# Altium PCB ufd0.PcbDoc
Units mil, origin at the board's own origin, x right, y up, seen from the top; angles counter-clockwise.
Board outline 6000 x 4000 mil, 6 copper layers (Top Layer, Ground1, Signal, Power, Ground2, Bottom Layer); 37 components, 40 nets, 120 pads, 0 vias.
Unrouted connection lines stored in the file: 66.
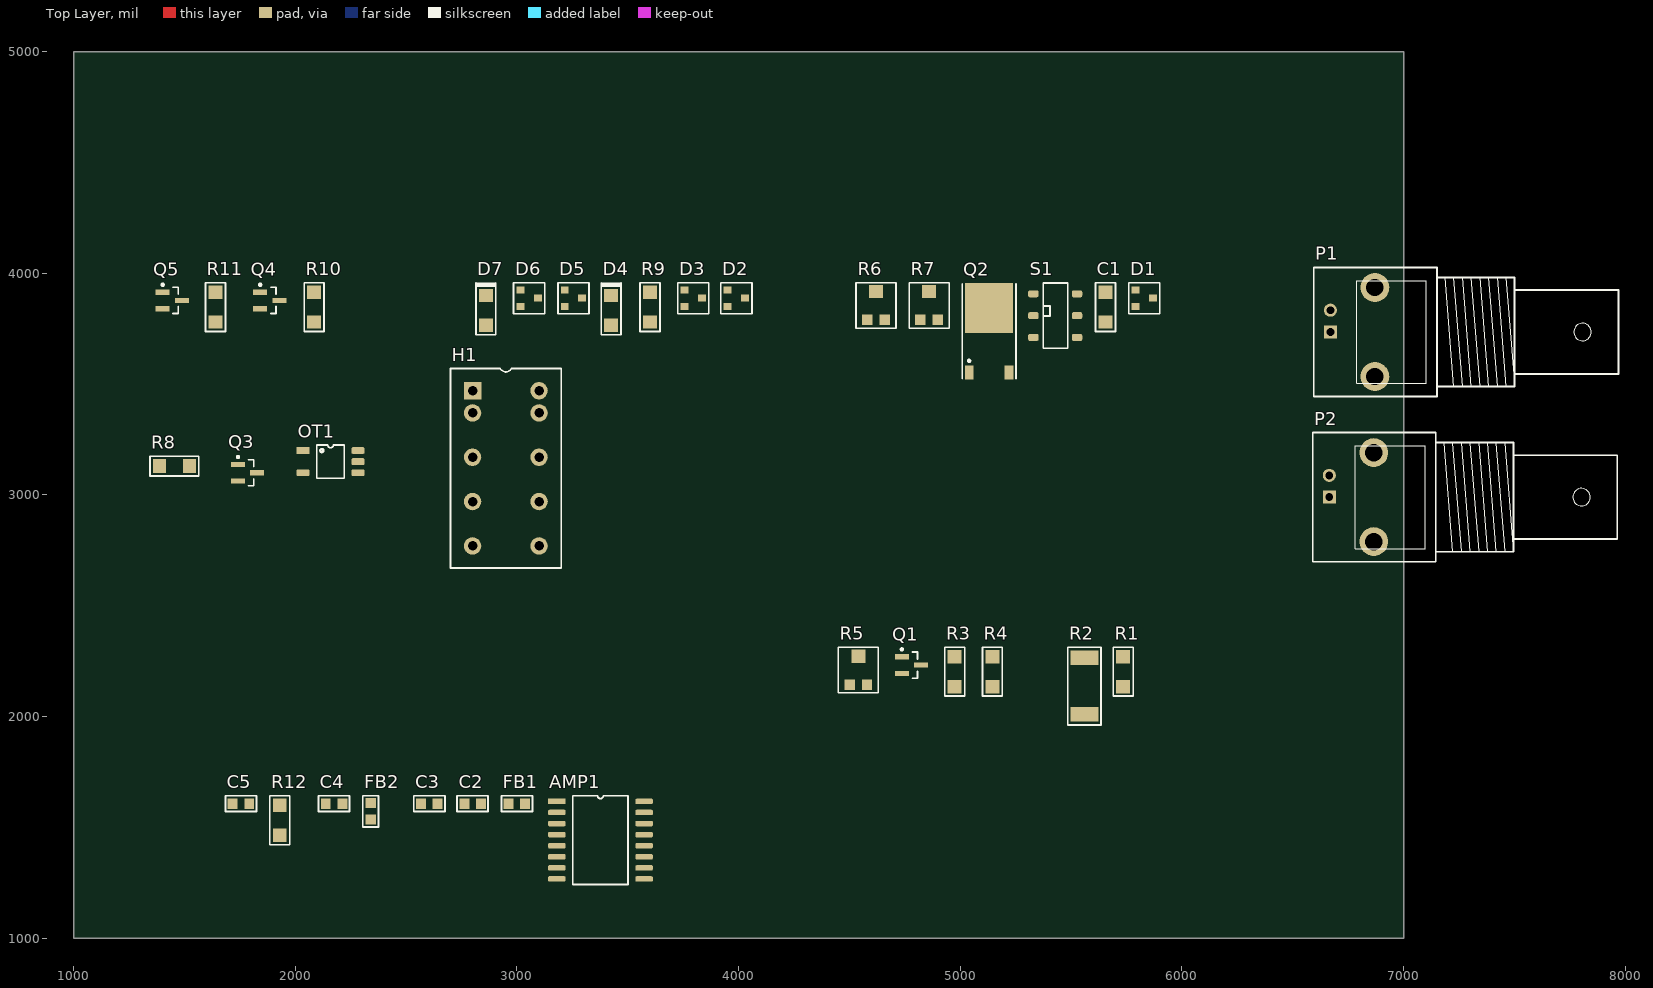
[diagram p0: Top Layer view]
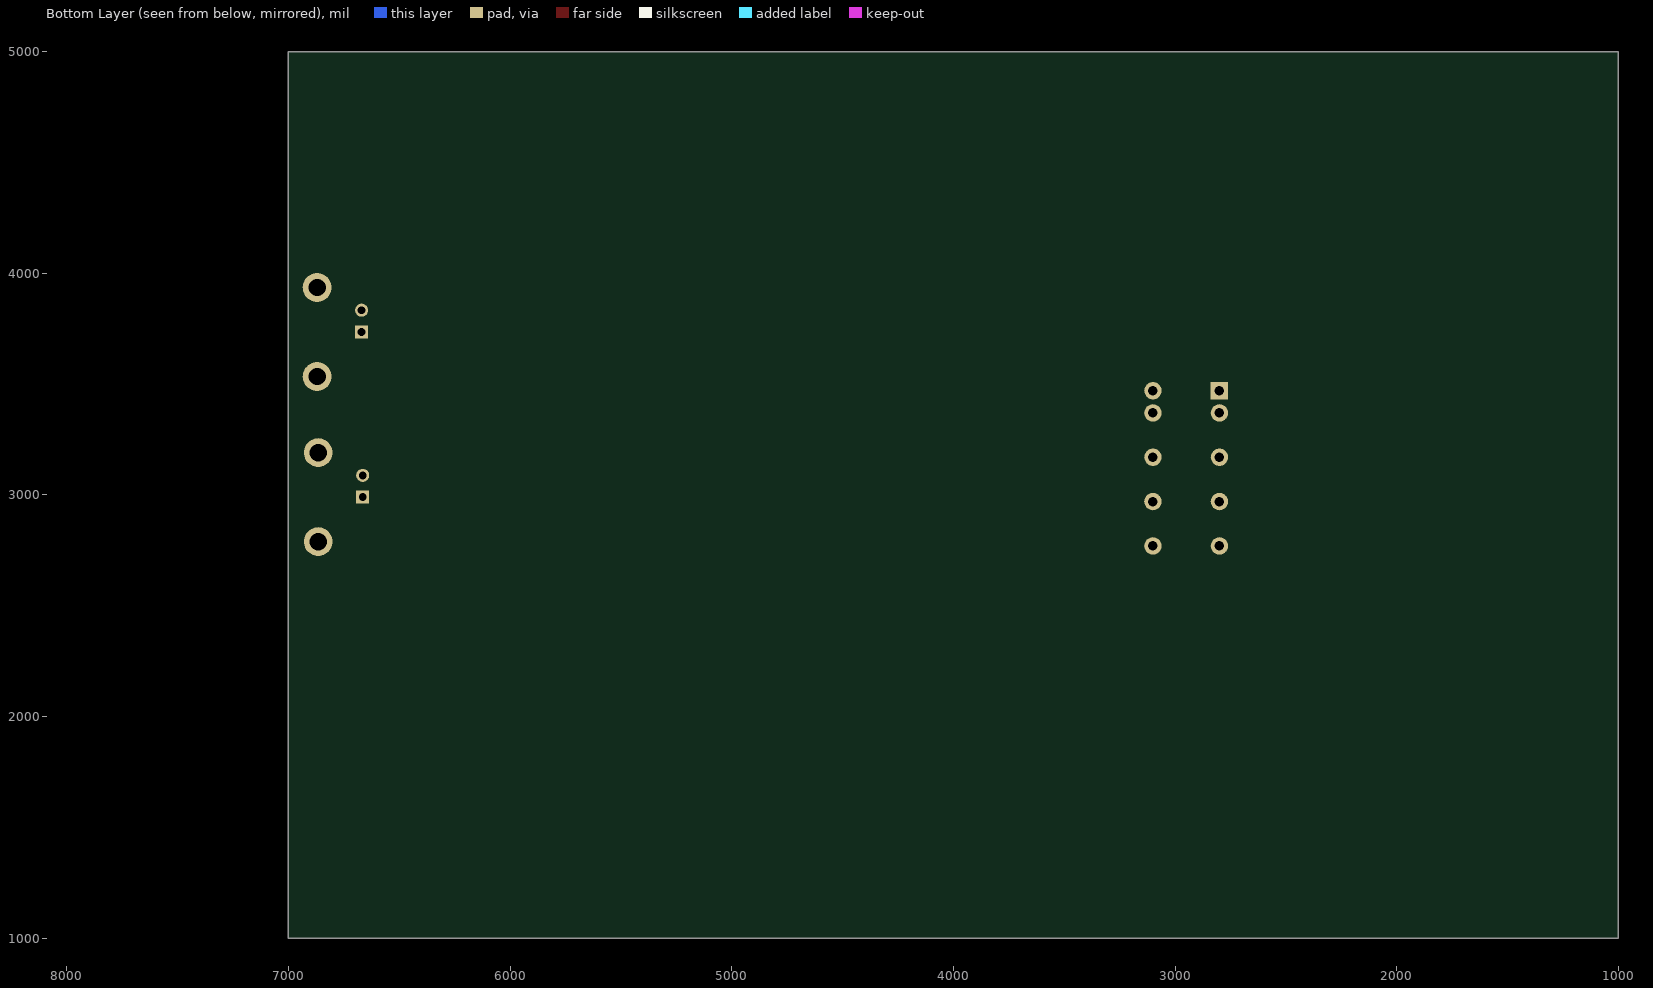
[diagram p1: Bottom Layer view, seen from below]
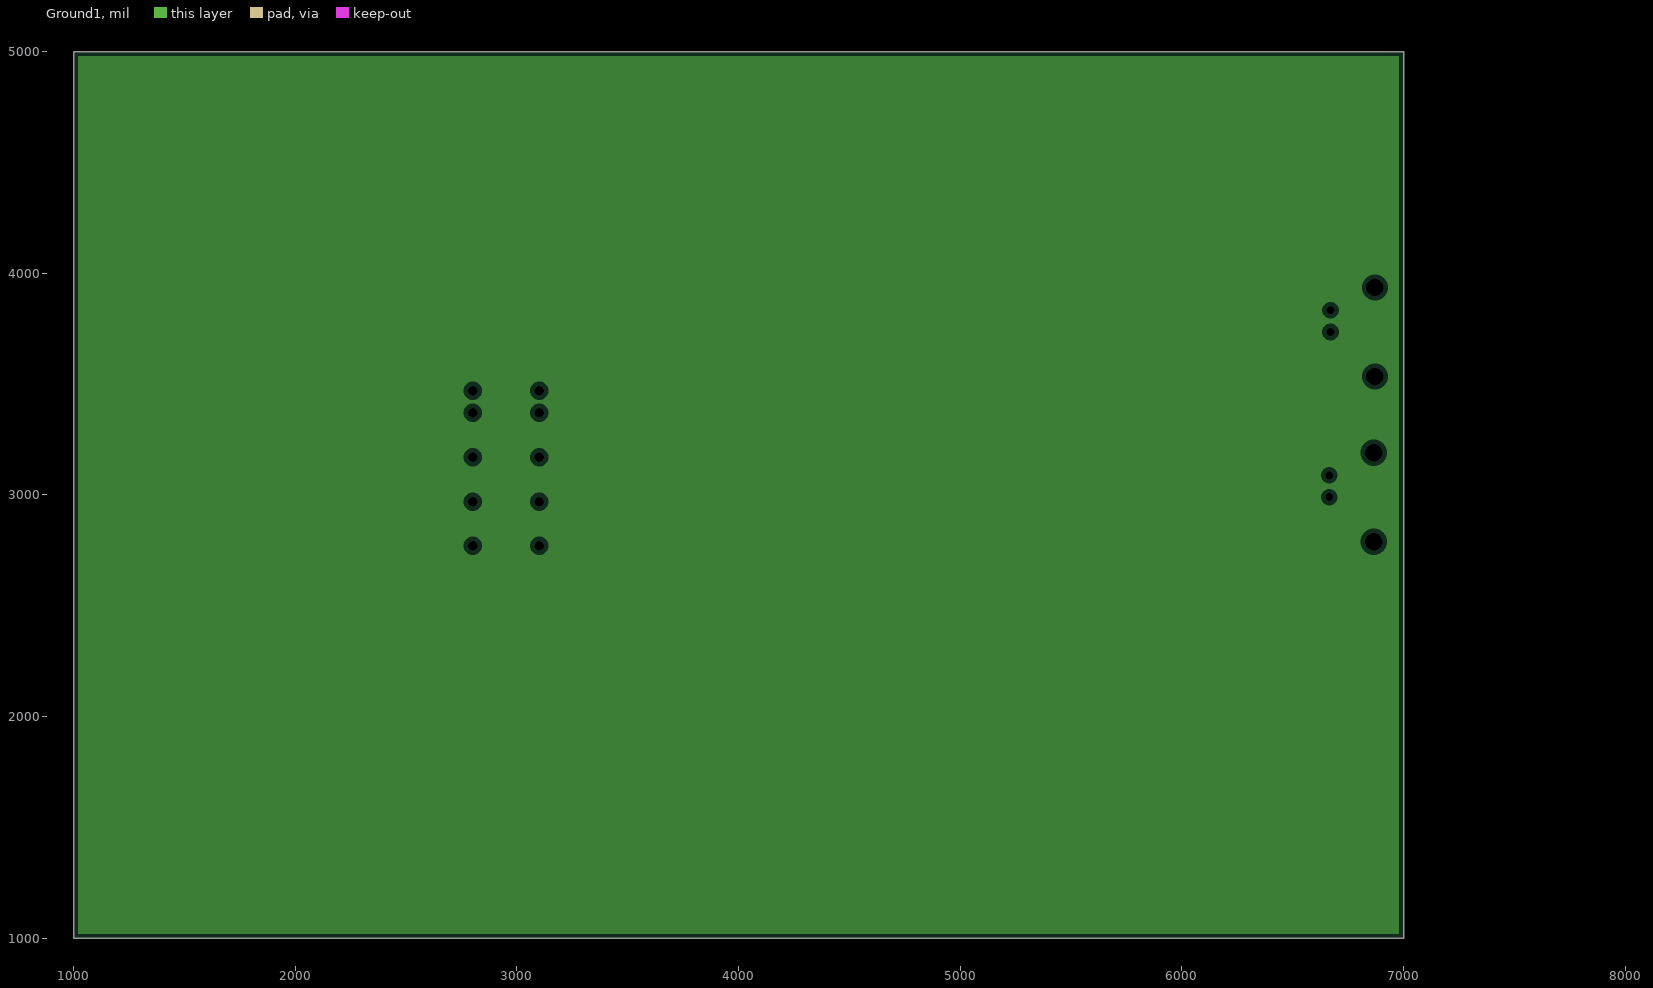
[diagram p2: Ground1, clearances drawn from the general rule]
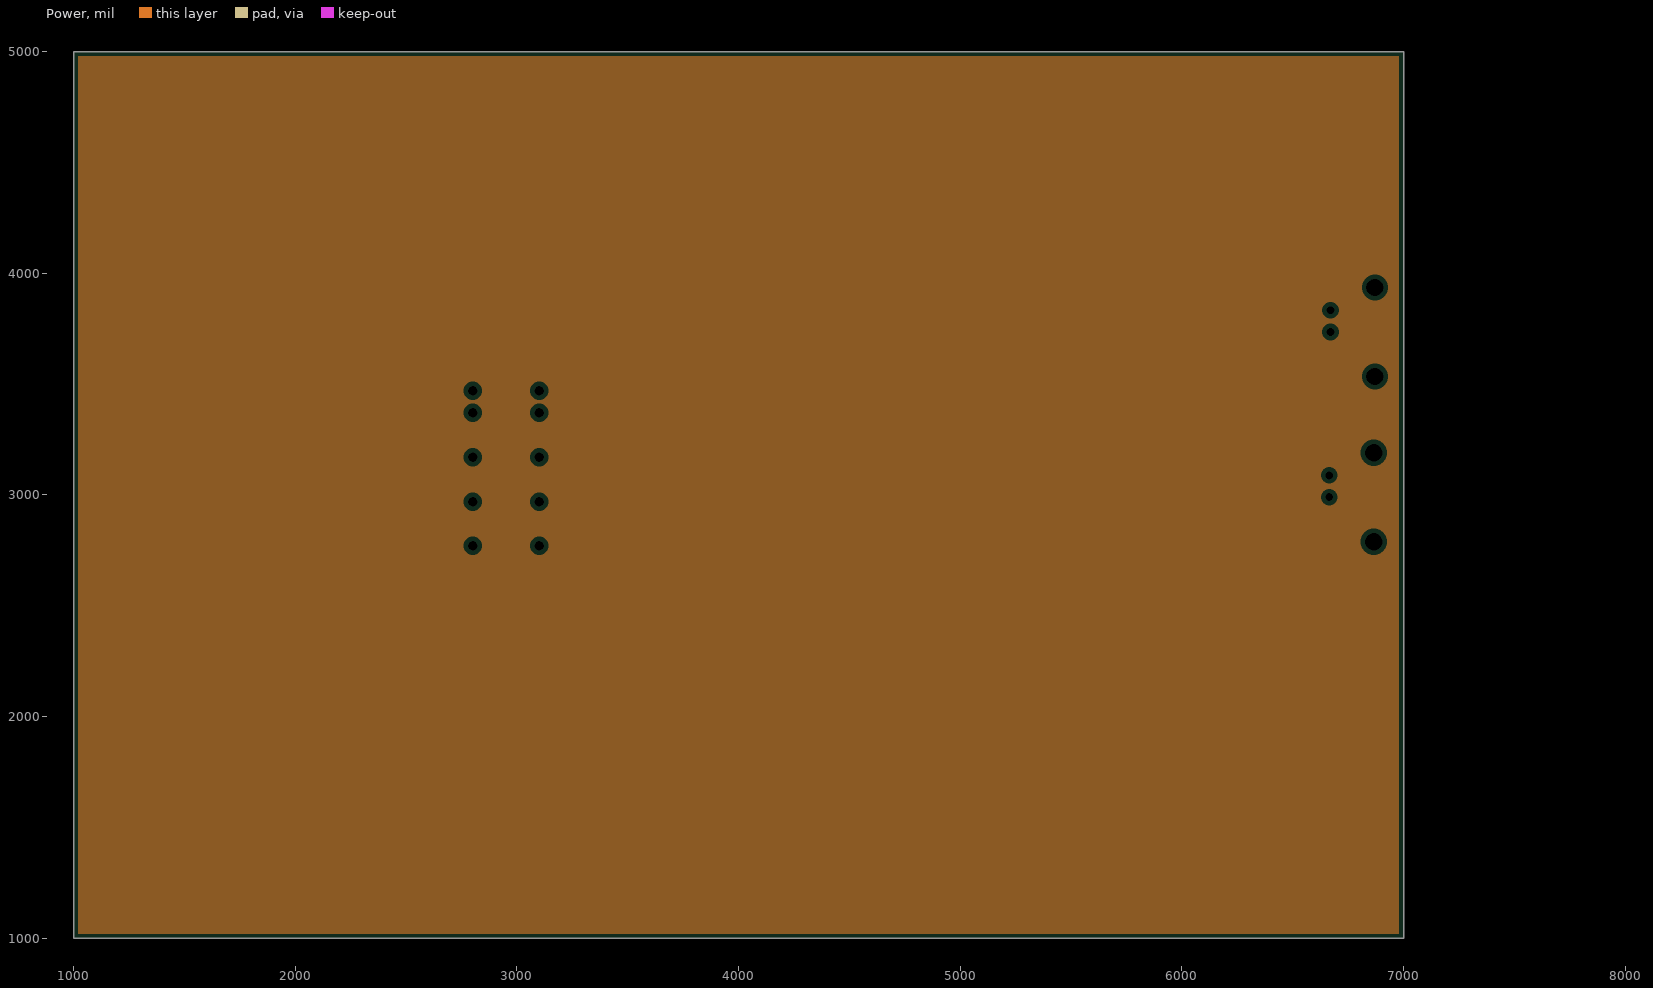
[diagram p3: Power, clearances drawn from the general rule]
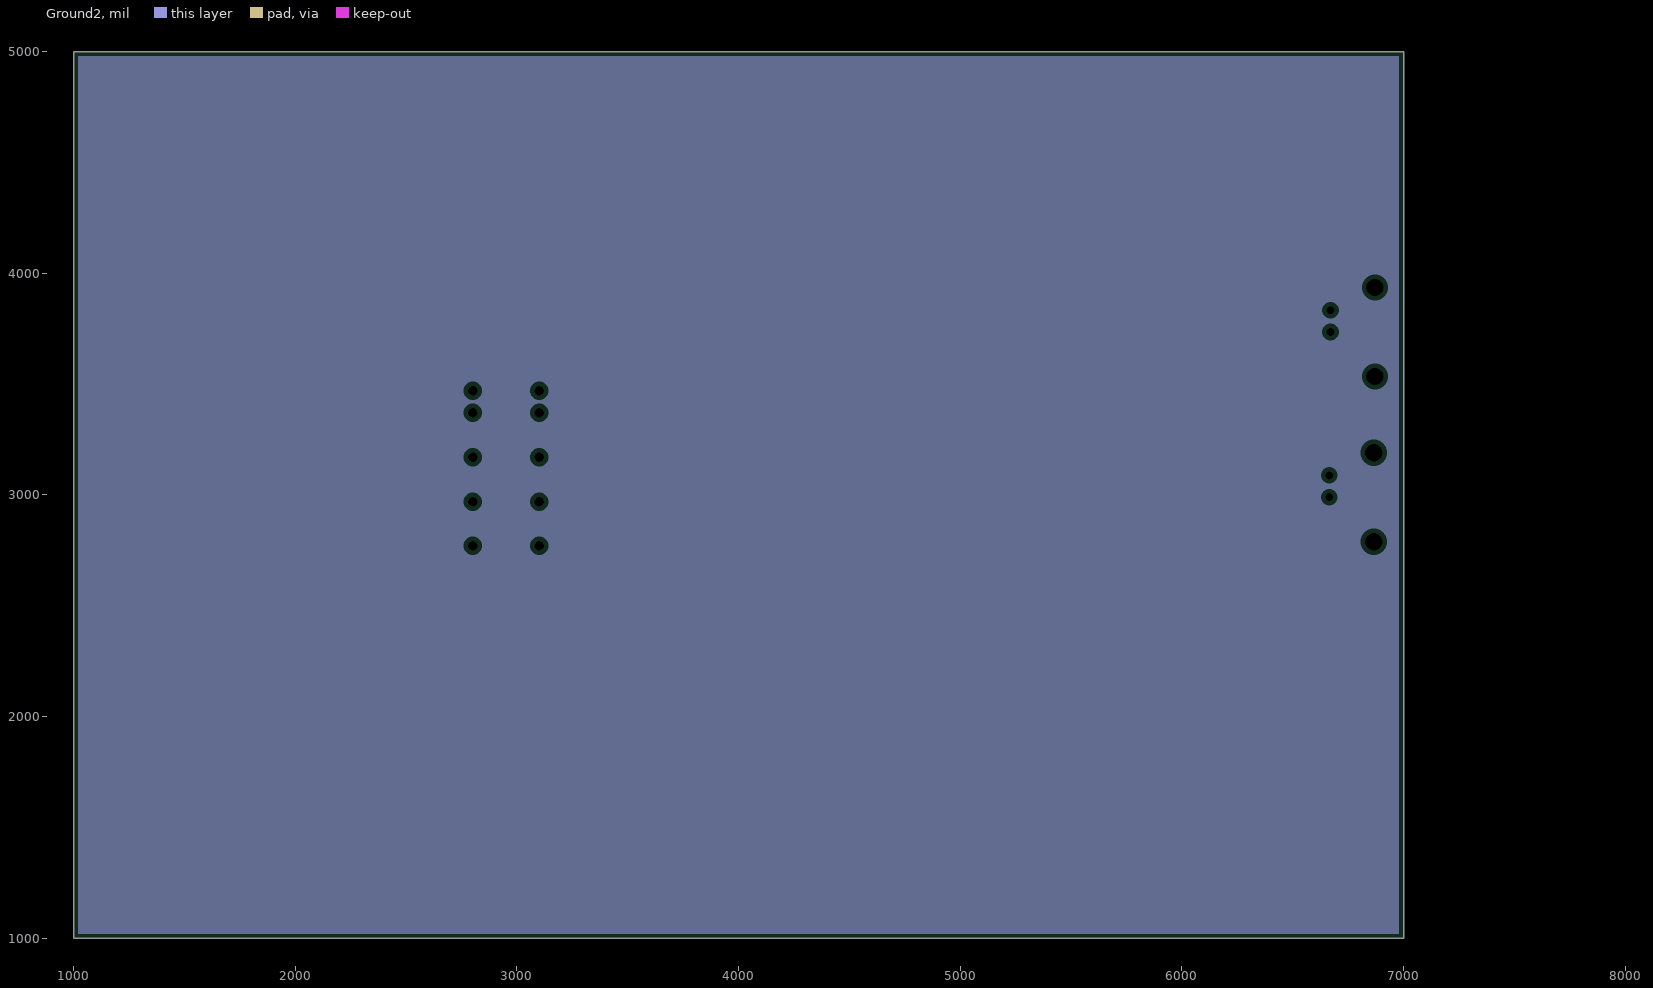
[diagram p4: Ground2, clearances drawn from the general rule]

## Layer stack, top to bottom
Top Layer: signal copper 1.4
Dielectric: core 12.6, FR-4, Dk 4.8
Ground1: plane copper 1.4
Dielectric: prepreg 12.6, FR-4, Dk 4.8
Signal: signal copper 1.4
Dielectric: core 12.6, FR-4, Dk 4.8
Power: plane copper 1.4
Dielectric: prepreg 12.6, FR-4, Dk 4.8
Ground2: plane copper 1.4
Dielectric: core 12.6, FR-4, Dk 4.8
Bottom Layer: signal copper 1.4

## Board outline
1000,1000 7000,1000 7000,5000 1000,5000

## Design rules (kind name [scope] priority, off if disabled: settings)
Clearance [All] p1: gap=10
PlaneClearance [All] p1: clearance=20
PlaneConnect [All] p1: planeconnectstyle=Relief reliefexpansion=20 reliefentries=4 reliefconductorwidth=10 reliefairgap=10
PolygonConnect [All] p1: connectstyle=Relief reliefconductorwidth=10 reliefentries=4 polygonreliefangle="90 Angle"
RoutingVias [All] p1: holewidth=28 width=50 viastyle="Through Hole" minholewidth=28 minwidth=50 maxholewidth=28 maxwidth=50
SilkscreenOverComponentPads [All] p1: minsilkscreentomaskgap=10
SolderMaskExpansion [All] p1: expansion=4
Width [All] p1: maxlimit=10 minlimit=10 preferedwidth=10
25 further rules are at their usual default settings.

## Classes and differential pairs
component class triger: C1 D1 D2 D3 D4 D5 D6 D7 H1 OT1 P1 P2 Q1 Q2 Q3 Q4 Q5 R1 R2 R3 R4 R5 R6 R7 R8 R9 R10 R11 S1
component class amplify: AMP1 C2 C3 C4 C5 FB1 FB2 R12

## Components (designator, comment, footprint, x,y, rotation, side; value= is the part's Value field where it differs from the comment)
AMP1 "AD602" SOP16 3180,1617.32 r0 top
C1 "C1206" 1206 5655,3847.32 r90 top
C2 "C0805" 0805 2800,1607.32 r0 top
C3 "C0805" 0805 2605,1607.32 r0 top
C4 "C0805" 0805 2175,1607.32 r0 top
C5 "C0805" 0805 1755,1607.32 r0 top
D1 "SMMBD914LT3G" SMMBD914LT3G 5830,3887.32 r0 top
D2 "SMMBD914LT3G" SMMBD914LT3G 3990,3887.32 r0 top
D3 "SMMBD914LT3G" SMMBD914LT3G 3795,3887.32 r0 top
D4 "ZMM2V4" DIODE1206 3425,3832.32 r90 top
D5 "SMMBD914LT3G" SMMBD914LT3G 3255,3887.32 r0 top
D6 "SMMBD914LT3G" SMMBD914LT3G 3055,3887.32 r0 top
D7 "ZMM2V4" DIODE1206 2860,3832.32 r90 top
FB1 "FB0805" 0805 3000,1607.32 r0 top
FB2 "FB0805" 0805 2340,1572.32 r90 top
H1 "HDF2-L2" RELAY-HFD2-L2 2800,3470 r0 top
OT1 "PC410L" SOP5 2035,3200 r0 top
P1 "BNC" "BNC_RA CON" 6670,3735 r180 top
P2 "BNC" "BNC_RA CON" 6665,2990 r180 top
Q1 "MMBT3906" SOT23_M 4780,2232.32 r0 top
Q2 "MTD6N10E" 369A-13 5130,3697.32 r0 top
Q3 "MMBT3904" SOT23_M 1785,3100 r0 top
Q4 "MMBT3904" SOT23_M 1885,3877.32 r0 top
Q5 "MMBT3904" SOT23_M 1445,3877.32 r0 top
R1 "R1206" 1206 5735,2202.32 r90 top
R2 "R2512" 2512 5560,2137.32 r90 top
R3 "R1206" 1206 4975,2202.32 r90 top
R4 "R1206" 1206 5145,2202.32 r90 top
R5 "ResAdj" "Adjust Resistor" 4540,2207.32 r0 top
R6 "ResAdj" "Adjust Resistor" 4620,3852.32 r0 top
R7 "ResAdj" "Adjust Resistor" 4860,3852.32 r0 top
R8 "R1206" 1206 1455,3130 r0 top
R9 "R1206" 1206 3600,3847.32 r90 top
R10 "R1206" 1206 2085,3847.32 r90 top
R11 "R1206" 1206 1640,3847.32 r90 top
R12 "R1206" 1206 1930,1532.32 r90 top
S1 "Switch" MSS-22C02 5330,3907.32 r0 top

## Footprints (in the part's own frame and the unit in brackets; to place one, negate y for a bottom-side part, rotate by r counter-clockwise, add the part's x,y. Pads: shape width x height; smd on the part's side, far side on the other; paste and mask are expansions set on the pad)
369A-13 [mm] "D-PAK/TO-252-AA; 3 Leads (1 Cropped); Body 10.3 (inc. leads) x 6.7 mm (LxW max)"
  rect 1x1.6 smd: 1(-2.285,-3.7) 3(2.285,-3.7)
  rect 5.5x5.7 smd: 4(0,3.7)
  silkscreen extent -3.08,-4.4 3.08,6.45
0805 [mm]
  rect 1.14x1.2 smd: 1(-0.95,0) 2(0.95,0)
  silkscreen extent -1.78,-0.89 1.78,0.89
1206 [mm]
  rect 1.52x1.6 smd: 1(-1.71,0) 2(1.71,0)
  silkscreen extent -2.79,-1.14 2.79,1.14
2512 [mm]
  rect 1.65x3.2 smd: 1(-3.24,0) 2(3.24,0)
  silkscreen extent -4.45,-1.91 4.44,1.91
"Adjust Resistor" [mm] "3 * 3"
  rect 1.2x1.2 smd: a(-1,-1.6) c(1,-1.6)
  rect 1.6x1.5 smd: b(0,1.65)
  silkscreen extent -2.29,-2.54 2.29,2.67
"BNC_RA CON" [mm] "Connector; BNC Elbow"
  rect 1.5x1.5 hole 0.9: 1(0,0)
  round 3.3 hole 2: 2(-5.1,5.1) 2(-5.1,-5.1)
  round 1.5 hole 0.9: 2(0,-2.5)
  silkscreen extent -33,-7.4 1.9,7.4
DIODE1206 [mm]
  rect 1.52x1.6 smd: 1(-1.71,0) 2(1.71,0)
  silkscreen extent -2.79,-1.14 3.17,1.14
MSS-22C02 [mm]
  rrect50% 1.2x0.8 smd: a(0,-2.5) aa(5,-2.5) b(0,0) bb(5,0) c(0,-5) cc(5,-5)
  silkscreen extent 1.14,-6.25 3.94,1.25
RELAY-HFD2-L2 [mm]
  rect 2x2 hole 1.1: 1(0,0)
  round 2 hole 1.1: 2(0,-2.54) 4(0,-7.62) 6(0,-12.7) 8(0,-17.78) 9(7.62,-17.78) 11(7.62,-12.7) 13(7.62,-7.62) 15(7.62,-2.54) 16(7.62,0)
  silkscreen extent -2.54,-20.32 10.16,2.54
SMMBD914LT3G [mm]
  rect 0.9x0.8 smd: 1(-1,0.95) 2(-1,-0.95) 3(1,0)
  silkscreen extent -1.78,-1.78 1.78,1.78
SOP5 [mm]
  rect 1.5x0.8 smd: 1(0,0)
  rrect50% 1.5x0.8 smd: 3(0,-2.54) 4(6.3,-2.54) 5(6.3,-1.27) 6(6.3,0)
  silkscreen extent 1.59,-3.17 4.72,0.64
SOP16 [mm]
  rect 2x0.63 smd: 1(0,0)
  rrect50% 2x0.63 smd: 2(0,-1.27) 3(0,-2.54) 4(0,-3.81) 5(0,-5.08) 6(0,-6.35) 7(0,-7.62) 8(0,-8.89) 9(10,-8.89) 10(10,-7.62) 11(10,-6.35) 12(10,-5.08) 13(10,-3.81) 14(10,-2.54) 15(10,-1.27) 16(10,0)
  silkscreen extent 1.83,-9.53 8.16,0.64
SOT23_M [mm] "SOT23, 3-Leads, Body 2.9x1.3mm, Pitch 0.95mm, Lead Span 2.3mm, IPC Low Density"
  rect 1.6x0.6 smd: 1(-1.1,0.95) 2(-1.1,-0.95) 3(1.1,0)
  silkscreen extent -1.22,-1.5 0.7,1.92, body extent -0.7,-1.5 0.7,1.5, height 1.1

## Part data
C1: "Capacitor, 1206"
C2 C3 C4 C5: "Capacitor, 0805"
D1 D2 D3 D5 D6: "Switching Diode"
D4 D7: "Voltage Stabilizing Diode, 2.4V"
FB1 FB2: "Chip Bead, 0805"
H1: library part Relay-HDF2-L2, "Relay, HDF2-XX-XX-L2-XX"
P1 P2: "BNC Elbow Connector"
Q1: "PNP Switching Transistor"
Q2: "TMOS E-FET Power Field Effect Transistor DPAK for Surface Mount"
Q3 Q4 Q5: "NPN Switching Transistor"
R1 R3 R4 R8 R9 R10 R11 R12: "Resistor, 1206, 1/4W"
R2: "Resistor, 2512, 1W"
R5 R6 R7: "Adjustable Resistor"
S1: library part MSS-22C02, "Duble Switch"

## Nets (pads, with @x,y where several pads share a name; then routed paths per layer and width w, separated by ;. In a path a pad name is that pad's centre, name@x,y a point inside that pad or via, vN(x,y) a via of type N, cw(c..) or ccw(c..) an arc to the next point about the centre after c; other vN are vias at no path point)
ADCIN+: AMP1.11
ADCIN-: AMP1.10
AGND: D5.3 D6.1 D7.2 OT1.4 P1.2 P2.2 Q2.3 R6.a R7.a R9.1
DGND: AMP1.9 AMP1.16 Q3.2 Q4.2 Q5.2
DIVIDE: R10.1
DV5: H1.1 H1.2 R3.1
GAINCTRL: AMP1.1 AMP1.8
NetAMP1_7: AMP1.7 C5.2 R12.1
NetAMP1_12: AMP1.12 C3.1 FB2.2
NetAMP1_13: AMP1.13 C2.1 FB1.1
NetAMP1_14: AMP1.14 C4.2
NetC1_1: C1.1 Q2.4 R2.1
NetC1_2: C1.2 D1.3 R6.b
NetC4_1: C4.1 R12.2
NetD1_1: D1.1 H1.4 R7.b
NetD2_1: D2.1 D3.3 S1.c
NetD2_3: D2.3 D5.1
NetD3_1: D3.1 D6.3
NetD4_1: D4.1 D7.1
NetD4_2: D4.2 S1.b
NetH1_6: H1.6 P1.1
NetH1_8: H1.8 P2.1 R5.a
NetH1_15: H1.15 Q4.3
NetH1_16: H1.16 Q5.3
NetOT1_1: OT1.1 R3.2
NetOT1_3: OT1.3 Q3.3
NetOT1_5: OT1.5 R1.1 R4.1
NetQ1_1: Q1.1 R4.2
NetQ1_3: Q1.3 Q2.1
NetQ3_1: Q3.1 R8.2
NetQ4_1: Q4.1 R10.2
NetQ5_1: Q5.1 R11.2
SIGNALGND: AMP1.3 AMP1.4 AMP1.5 AMP1.6 AMP1.15 C2.2 C3.2 C5.1
SINGLE: R11.1
TRIG: R8.1
V5: FB1.2 OT1.6
V12: Q1.2 R1.2
V400: R2.2
V-5: FB2.1
WAVESIGNAL: AMP1.2 R5.b R9.2 S1.a
pads on no net: D1.2 D2.2 D3.2 D5.2 D6.2 H1.9 H1.11 H1.13 R5.c R6.c R7.c S1.aa S1.bb S1.cc

## Polygon pours and split planes (outlines as drawn)
no net on Ground1 (split plane): 6979.9,1020.1 1020.1,1020.1 1020.1,4979.9 6979.9,4979.9
no net on Power (split plane): 6979.9,1020.1 1020.1,1020.1 1020.1,4979.9 6979.9,4979.9
no net on Ground2 (split plane): 6979.9,1020.1 1020.1,1020.1 1020.1,4979.9 6979.9,4979.9